# Altium PCB SiLPA.PcbDoc (part 6 of 10)
Units mm, origin at the board's own origin, x right, y up, seen from the top; angles counter-clockwise.
Board outline 222.36 x 100 mm, 4 copper layers (L1, P2, L3, L4), stack 1.598 mm thick; 583 components, 330 nets, 1692 pads, 1781 vias.
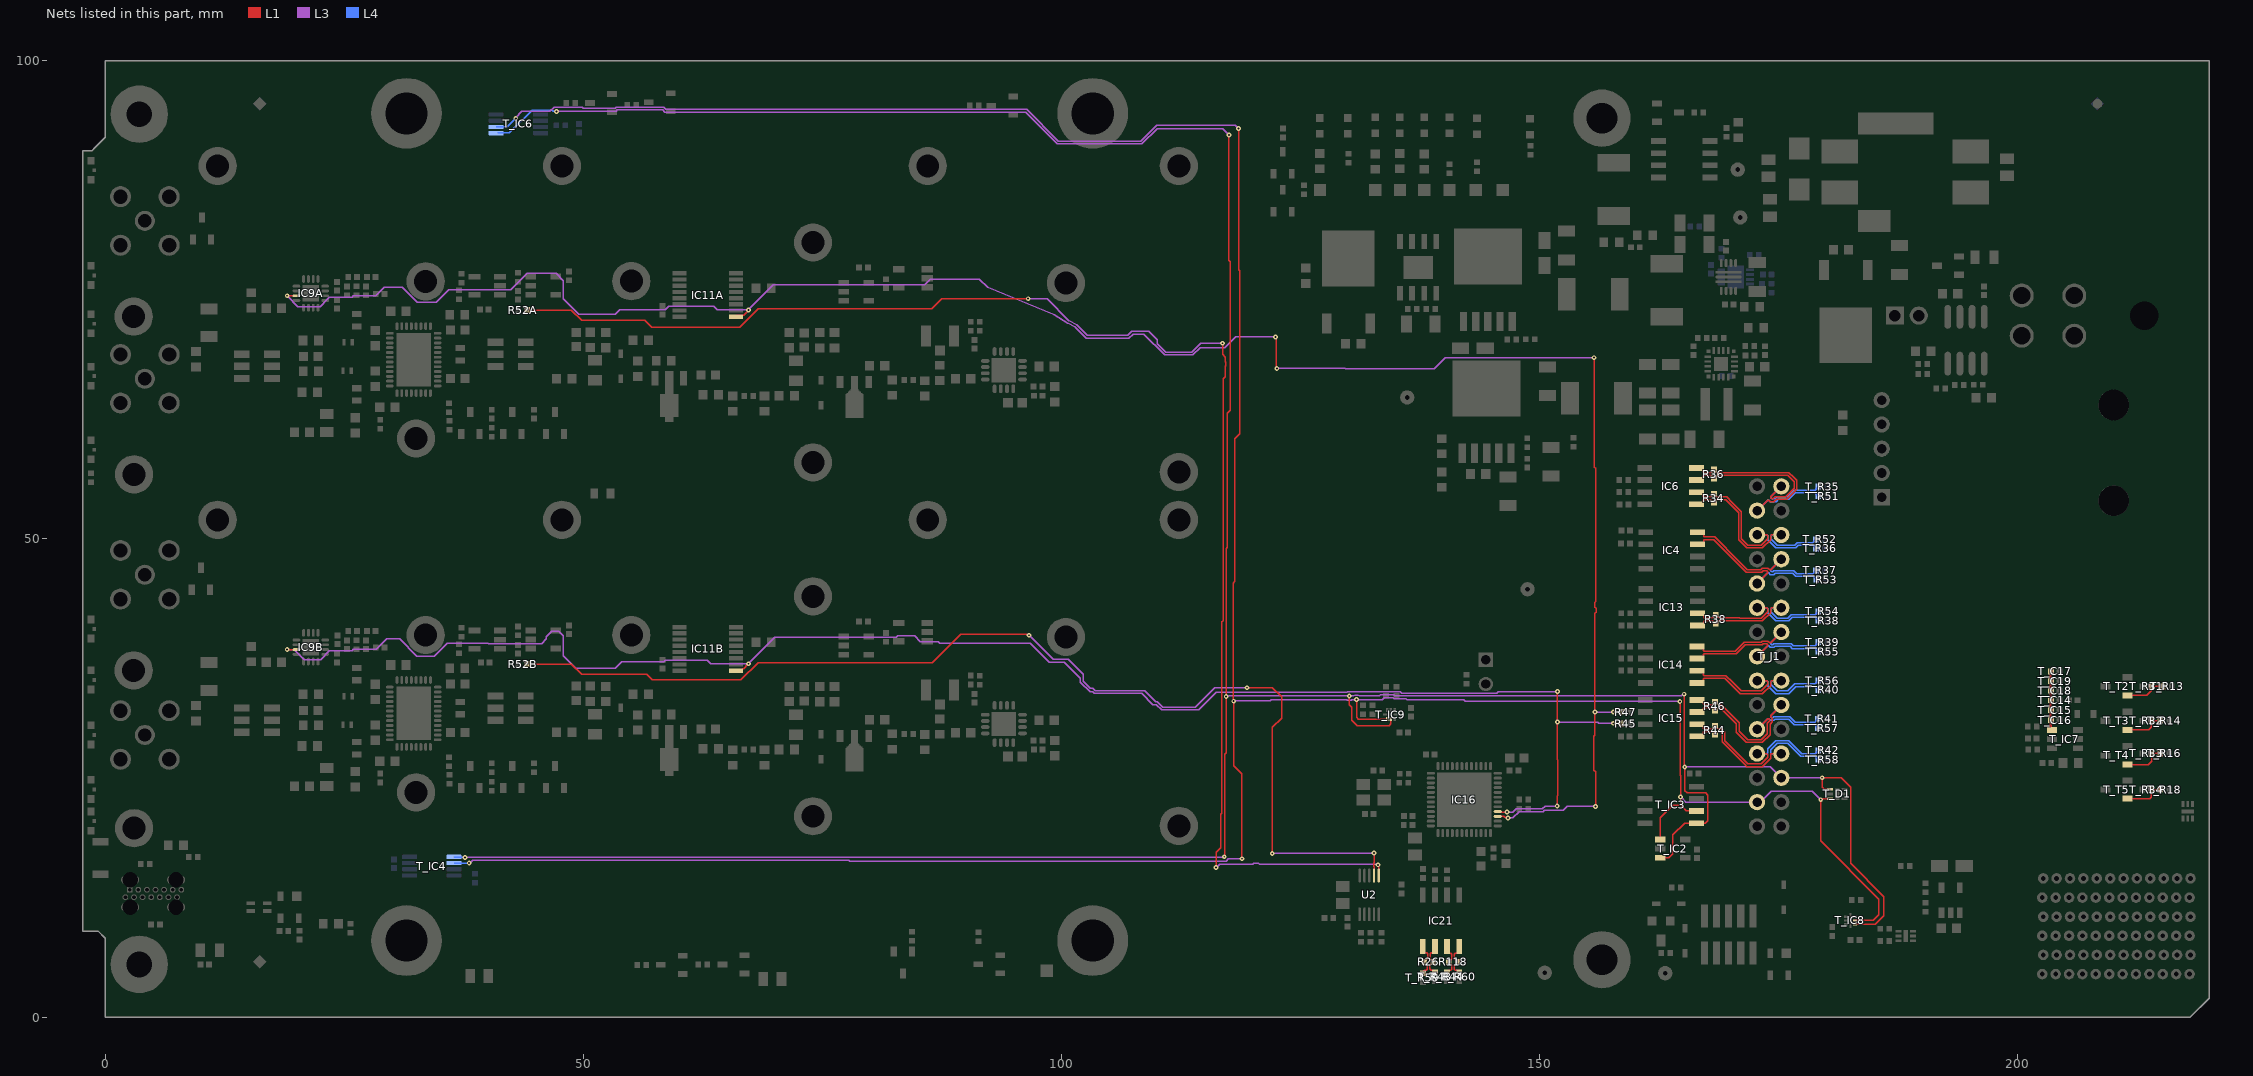
[diagram p6: the nets of this part, all layers, seen from the top]

## Via types
v1: diameter 0.5, hole 0.2, L1 to L4, tented both sides, 1301 vias
v2: diameter 0.6, hole 0.3, L1 to L4, tented both sides, 443 vias
v3: diameter 0.8, hole 0.5, L1 to L4, tented both sides, 25 vias
v4: diameter 0.5, hole 0.2, L1 to L4, 8 vias
v5: diameter 1.27, hole 0.711, L1 to L4, tented both sides, 4 vias

## Nets (pads, with @x,y where several pads share a name; then routed paths per layer and width w, separated by ;. In a path a pad name is that pad's centre, name@x,y a point inside that pad or via, vN(x,y) a via of type N, cw(c..) or ccw(c..) an arc to the next point about the centre after c; other vN are vias at no path point) (continued)
CT: T_C14.2 T_C15.2 T_C16.2 T_C17.2 T_C18.2 T_C19.2 T_IC7.4 | length 6.2
  L1 w0.257: T_C17.2@203.448,36.148 203.448,30.126 T_IC7.4@203.553,30.022
DAC_OUT1: R52A.1 U2.6 | length 151.6
  L1 w0.152: R52A.1@44.1,73.92 48.721,73.92 49.795,72.846 56.428,72.846 57.118,72.156 66.365,72.156 68.269,74.059 86.4,74.059 87.466,75.125 v1(96.5,75.125) ; v1(116.15,15.651) 116.15,17.225 116.636,17.711 116.636,21.21 116.753,21.328 116.753,41.33 116.878,41.454 116.878,49.3 116.878,66.759 117.103,66.983 117.103,68.067 117.15,68.114 117.15,68.49 117.103,68.537 117.103,69.009 116.827,69.285 116.827,70.458 v1(116.821,70.465) ; v1(133.081,15.925) 133.081,15.831 133.163,15.748 U2.6@133.163,14.8
  L3 w0.152: v1(96.5,75.125) 98.479,75.125 100.769,72.836 100.787,72.825 101.57,72.392 102.688,71.274 106.921,71.274 107.347,71.699 109.133,71.699 110.024,70.809 110.024,70.389 110.889,69.524 113.611,69.524 114.553,70.465 v1(116.821,70.465) ; v1(116.15,15.651) 116.195,15.651 116.511,15.967 119.98,15.967 120.106,16.094 120.482,16.094 120.489,16.086 120.574,16.086 120.692,15.967 133.038,15.967 v1(133.081,15.925)
DAC_OUT2: R52B.1 U2.7 | length 116.4
  L1 w0.152: R52B.1@43.979,36.92 48.721,36.92 49.795,35.846 56.607,35.846 57.191,35.262 66.471,35.262 68.269,37.059 86.452,37.059 89.448,40.055 96.375,40.055 96.506,39.924 v1(96.6,39.924) ; v1(119.386,34.441) 122.043,34.441 123,33.484 123,31.265 122.024,30.289 v1(122.024,17.1) ; U2.7@132.663,14.8 132.663,15.701 132.627,15.737 132.627,16.112 132.663,16.148 v1(132.663,17.156)
  L3 w0.152: v1(96.6,39.924) 99.129,37.395 100.682,37.395 102.242,35.834 102.242,35.129 102.967,34.405 103.258,34.405 103.533,34.13 108.68,34.13 109.846,32.964 110.004,32.964 110.573,32.394 113.972,32.394 116.019,34.441 v1(119.386,34.441) ; v1(122.024,17.1) 122.08,17.156 v1(132.663,17.156)
DET_RST0: IC9A.15 IC11A.1 IC16.27 R47.1 | length 215.4
  L1 w0.152: v1(19.02,75.43) IC9A.15@19.99,75.43 ; IC11A.1@65.95,73.225 66.099,73.374 66.746,73.374 67.25,73.878 v1(67.25,73.952) ; v1(122.375,71.125) 122.439,71.061 122.439,67.891 v1(122.504,67.826) ; IC16.27@145.553,20.992 146.248,20.992 146.358,20.882 146.628,20.882 v1(146.679,20.832) ; v1(155.675,68.953) 155.675,57.515 155.825,57.365 155.825,43.451 155.767,43.393 155.767,42.855 155.895,42.727 155.895,42.352 155.767,42.224 155.767,29.48 155.651,29.363 155.651,25.828 155.825,25.654 v1(155.825,22.025) ; v1(157.678,31.9) R47.1@158.529,31.9
  L3 w0.152: v1(19.02,75.43) 20.15,74.3 22.5,74.3 22.85,74.65 ; 22.823,74.677 23.442,75.295 25.801,75.295 25.924,75.418 28.283,75.418 29.158,76.294 31.04,76.294 32.604,74.73 34.613,74.73 35.93,76.047 42.388,76.047 44.099,77.758 47.154,77.758 47.909,77.002 47.909,75.108 49.523,73.494 53.322,73.494 53.802,73.974 58.541,73.974 58.895,74.328 63.634,74.328 64.01,73.952 v1(67.25,73.952) 69.86,76.562 85.67,76.562 86.262,77.153 91.399,77.153 92.257,76.295 99.122,73.474 99.205,73.429 100.653,72.556 100.696,72.556 101.381,72.177 101.4,72.166 101.415,72.151 102.572,70.994 107.037,70.994 107.462,71.42 108.597,71.42 110.773,69.244 113.727,69.244 114.495,70.012 117.054,70.012 118.194,71.151 v1@122.375,71.151 ; v1(122.504,67.826) 129.633,67.826 129.679,67.78 138.964,67.78 140.137,68.953 v1(155.675,68.953) ; v1(146.679,20.832) 147.176,20.832 147.841,21.497 150.363,21.497 150.486,21.619 152.444,21.619 152.85,22.025 v1(155.825,22.025) ; v1@155.768,31.9 v1@157.678,31.9
  other v1: 155.767,31.899
DET_RST1: IC9B.15 IC11B.1 IC16.28 R45.1 | length 172.9
  L1 w0.152: v1(19.02,38.43) IC9B.15@19.99,38.43 ; IC11B.1@65.95,36.225 66.45,36.225 66.672,36.447 66.759,36.447 66.965,36.652 66.965,36.667 v1(67.25,36.952) ; IC16.28@145.553,21.492 145.626,21.418 145.989,21.418 145.991,21.416 146.533,21.416 v1(146.564,21.448) ; v1(151.813,22.073) 151.843,22.102 151.843,23.12 151.857,23.134 151.857,26.889 151.843,26.904 v1(151.843,30.858) 151.843,34.026 v1(151.848,34.031) ; v1(157.678,30.715) 158.511,30.715 R45.1@158.53,30.696
  L3 w0.152: v1(19.02,38.43) 19.743,38.43 20.788,37.385 22.531,37.385 23.442,38.295 25.801,38.295 25.948,38.443 28.307,38.443 29.427,39.563 30.772,39.563 32.587,37.747 34.413,37.747 35.754,39.089 40.02,39.089 40.062,39.047 45.623,39.047 46.132,39.556 46.132,39.788 46.668,40.324 47.409,40.324 47.867,39.865 47.867,37.805 49.177,36.494 53.322,36.494 54,37.172 58.39,37.172 58.546,37.328 62.936,37.328 63.313,36.952 v1(67.25,36.952) 69.996,39.698 82.698,39.698 82.861,39.861 84.639,39.861 85.24,39.26 87.099,39.26 87.249,39.11 96.723,39.11 98.717,37.116 100.275,37.116 101.963,35.428 101.963,35.014 102.982,33.994 103.273,33.994 103.417,33.85 108.374,33.85 109.54,32.684 109.888,32.684 110.457,32.115 114.314,32.115 116.187,33.988 129.844,33.988 129.887,34.031 135.421,34.031 135.579,33.873 145.519,33.873 145.677,34.031 v1(151.848,34.031) ; v1(146.564,21.448) 146.595,21.416 147.178,21.416 147.537,21.776 150.248,21.776 150.544,22.073 v1(151.813,22.073) ; v1(151.843,30.858) 151.891,30.81 156.047,30.81 156.142,30.715 v1(157.678,30.715)
EEM0_I2C.SCL: T_D1.3 T_IC2.1 T_IC3.6 T_IC4.2 T_IC6.2 T_IC8.3 T_IC9.6 T_J1.27 | length 345
  L1 w0.152: v1(117.987,33.034) 117.939,33.081 117.939,45.388 118.113,45.562 118.113,60.487 118.6,60.974 118.6,78.055 118.5,78.155 v1(118.5,92.914) ; v1@118.003,33.034 118.003,26.295 118.855,25.443 v1(118.855,16.558) ; v1(130.835,33.203) 130.835,31.367 131.042,31.16 T_IC9.6@134.029,31.16 ; T_IC2.1@162.604,18.575 162.604,20.853 163.919,22.167 164.715,22.167 ; v1(164.64,32.996) 164.703,32.933 164.703,25.274 164.72,25.257 164.72,23.03 v1(164.715,23.025) 164.715,22.167 ; T_IC3.6@166.4,21.552 165.329,21.552 164.715,22.167 ; T_J1.27@172.625,22.6 T_J1.27@173.025,22.6 ; T_D1.3@180.34,22.828 180.337,22.825 179.562,22.825 179.469,22.732 v1(179.375,22.732) 179.375,18.421 185.466,12.33 185.466,10.695 184.873,10.101 T_IC8.3@182.958,10.101
  L3 w0.152: v1(38.05,16.104) 38.095,16.104 38.411,16.421 77.749,16.421 77.857,16.313 117.195,16.313 117.439,16.558 v1(118.855,16.558) ; v1(42.925,93.983) 42.925,94.059 43.566,94.7 46.489,94.7 46.933,95.144 49.857,95.144 49.983,95.017 53.303,95.017 53.422,95.136 58.403,95.136 58.63,94.909 96.353,94.909 99.66,91.601 108.274,91.601 109.923,93.25 118.164,93.25 v1(118.5,92.914) ; v1(117.987,33.034) 118.033,33.079 121.817,33.079 121.941,33.203 129.809,33.203 129.887,33.125 130.262,33.125 130.341,33.203 v1(130.835,33.203) 133.513,33.203 133.727,33.418 134.616,33.418 134.762,33.272 136.036,33.272 136.104,33.203 142.037,33.203 142.202,33.038 164.598,33.038 v1(164.64,32.996) ; v1(164.715,23.025) 165.261,22.478 T_J1.27@172.714,22.478 173.028,22.478 174.175,23.625 178.482,23.625 v1(179.375,22.732)
  L4 w0.152: T_IC4.2@36.471,16.104 v1(38.05,16.104) ; T_IC6.2@40.86,93.076 42.019,93.076 42.461,93.519 ; 42.462,93.519 v1@42.925,93.982
EEM0_I2C.SDA: T_D1.1 T_IC2.3 T_IC3.5 T_IC4.1 T_IC6.1 T_IC8.2 T_IC9.7 T_J1.26 | length 353.5
  L1 w0.152: v1(117.007,16.767) 117.033,16.792 117.033,27.471 117.207,27.644 117.207,48.987 117.331,49.112 117.331,63.152 117.647,63.468 117.647,78.975 117.5,79.122 v1(117.5,92.25) ; v1(130.075,33.578) 130.075,32.646 130.337,32.385 130.337,31.042 130.905,30.473 134.238,30.473 134.429,30.664 T_IC9.7@134.429,31.16 ; T_IC2.3@162.604,16.675 163.5,16.675 163.904,17.079 163.904,19.044 165.143,20.282 T_IC3.5@166.4,20.282 166.407,20.289 167.314,20.289 167.57,20.545 167.57,23.22 167.345,23.445 165.401,23.445 165.156,23.69 v1(165.156,26.165) 165.125,26.197 165.125,33.733 v1(165.093,33.764) ; T_D1.1@180.34,23.828 180.337,23.832 179.722,23.832 179.525,24.028 v1(179.525,25.025) 181.525,25.025 182.505,24.045 182.505,16.07 185.965,12.61 185.965,10.615 185.051,9.701 T_IC8.2@182.958,9.701
  L3 w0.152: v1(37.614,16.7) 116.847,16.7 116.913,16.767 v1(117.007,16.767) ; v1(47.187,94.691) 47.234,94.738 53.419,94.738 53.538,94.857 58.287,94.857 58.515,94.629 96.237,94.629 99.545,91.322 108.39,91.322 109.983,92.914 116.836,92.914 v1(117.5,92.25) ; v1(117.207,33.535) 117.25,33.578 v1(130.075,33.578) 130.569,33.578 130.647,33.656 131.023,33.656 131.101,33.578 133.225,33.578 133.344,33.697 134.732,33.697 134.851,33.578 164.813,33.578 164.999,33.764 v1(165.093,33.764) ; v1(165.156,26.165) 174.108,26.165 T_J1.26@175.254,25.018 175.258,25.022 179.522,25.022 v1(179.525,25.025)
  L4 w0.152: T_IC4.1@36.471,16.754 36.498,16.727 37.587,16.727 v1(37.614,16.7) ; T_IC6.1@41.06,92.454 42.248,92.454 44.626,94.832 46.735,94.832 46.846,94.721 47.156,94.721 v1(47.187,94.691)
EEM_IO.LVDS_N0: IC6.4 R36.2 T_J1.3 T_R51.2 | length 25.1
  L1 w0.152: IC6.4@166.378,57.425 166.797,57.425 167.021,57.201 167.021,57.019 167.112,56.928 167.89,56.928 167.98,57.017 167.98,57.044 168.193,57.258 R36.2@168.213,57.258 168.233,57.258 168.447,57.044 168.447,57.017 168.537,56.928 176.057,56.928 176.55,56.434 176.875,56.11 176.875,55.199 175.817,54.14 174.723,54.14 174.478,53.895 174.12,53.895 173.949,54.066 173.822,54.066 T_J1.3@172.714,52.958
  L4 w0.152: T_J1.3@172.714,52.958 173.822,54.066 173.949,54.066 174.12,53.895 174.702,53.895 174.947,54.14 176.032,54.14 176.727,54.834 178.827,54.834 178.916,54.745 178.916,54.684 T_R51.2@179.13,54.47
EEM_IO.LVDS_N1: IC6.1 R34.1 T_J1.6 T_R52.2 | length 20.8
  L1 w0.152: IC6.1@166.378,53.615 166.797,53.615 167.021,53.839 167.021,54.021 167.111,54.11 167.65,54.11 167.655,54.115 167.87,54.115 167.96,54.026 167.96,53.999 168.173,53.785 R34.1@168.193,53.785 168.213,53.785 168.427,53.999 168.427,54.026 168.517,54.115 169.424,54.115 170.029,53.51 170.794,52.746 170.794,49.904 170.957,49.741 171.474,49.224 171.638,49.06 173.277,49.06 174.124,49.908 174.124,50.329 174.213,50.418 T_J1.6@175.254,50.418
  L4 w0.152: T_J1.6@175.254,50.418 174.213,50.418 174.124,50.329 174.124,50.023 174.808,49.34 176.661,49.34 176.929,49.608 178.547,49.608 178.636,49.698 178.636,49.736 T_R52.2@178.85,49.95
EEM_IO.LVDS_N2: IC4.7 T_J1.9 T_R53.2 | length 17.9
  L1 w0.152: IC4.7@166.479,49.435 166.898,49.435 167.122,49.659 167.122,49.841 167.211,49.93 168.173,49.93 170.666,47.437 171.598,46.505 173.226,46.505 173.383,46.662 173.733,46.662 173.822,46.573 173.822,46.446 T_J1.9@172.714,45.338
  L4 w0.152: T_J1.9@172.714,45.338 173.822,46.446 173.949,46.446 174.12,46.275 174.478,46.275 174.594,46.392 176.456,46.392 176.76,46.087 178.583,46.087 178.672,45.998 178.672,45.97 T_R53.2@178.886,45.756
EEM_IO.LVDS_N3: IC13.1 R38.1 T_J1.12 T_R54.2 | length 17.3
  L1 w0.152: IC13.1@166.478,40.952 166.897,40.952 167.121,41.176 167.121,41.358 167.211,41.447 167.497,41.447 167.511,41.462 168.072,41.462 168.162,41.372 168.162,41.345 168.375,41.131 R38.1@168.395,41.131 168.415,41.131 168.629,41.345 168.629,41.372 168.718,41.462 170.792,41.462 170.813,41.44 173.277,41.44 174.124,42.288 174.124,42.709 174.213,42.798 T_J1.12@175.254,42.798
  L4 w0.152: T_J1.12@175.254,42.798 174.213,42.798 174.124,42.709 174.124,42.403 174.808,41.72 175.917,41.72 176.277,42.08 178.827,42.08 178.916,42.169 178.916,42.216 T_R54.2@179.13,42.43
EEM_IO.LVDS_N4: IC14.7 T_J1.15 T_R55.2 | length 17.1
  L1 w0.152: IC14.7@166.45,37.484 166.869,37.484 167.093,37.708 167.093,37.89 167.182,37.979 170.556,37.979 171.502,38.926 173.266,38.926 173.383,39.042 173.733,39.042 173.822,38.953 173.822,38.826 T_J1.15@172.714,37.718
  L4 w0.152: T_J1.15@172.714,37.718 173.822,38.826 173.949,38.826 174.12,38.655 174.478,38.655 174.594,38.772 176.176,38.772 176.41,38.538 178.176,38.538 178.199,38.56 178.797,38.56 178.886,38.471 178.886,38.414 T_R55.2@179.1,38.2
EEM_IO.LVDS_N5: IC14.5 T_J1.18 T_R56.2 | length 17.8
  L1 w0.152: IC14.5@166.45,34.944 166.869,34.944 167.093,35.168 167.093,35.35 167.182,35.439 169.341,35.439 170.036,34.744 170.796,33.984 170.96,33.82 173.277,33.82 174.124,34.668 174.124,35.089 174.213,35.178 T_J1.18@175.254,35.178
  L4 w0.152: T_J1.18@175.254,35.178 174.213,35.178 174.124,35.089 174.124,34.783 174.808,34.1 175.917,34.1 176.656,34.839 178.827,34.839 178.916,34.928 178.916,34.965 T_R56.2@179.13,35.178
EEM_IO.LVDS_N6: IC15.4 R46.2 T_J1.21 T_R57.2 | length 21
  L1 w0.152: IC15.4@166.424,33.169 166.843,33.169 167.067,32.946 167.067,32.763 167.156,32.674 167.442,32.674 167.478,32.639 167.99,32.639 168.08,32.728 168.08,32.755 168.293,32.969 R46.2@168.313,32.969 168.333,32.969 168.547,32.755 168.547,32.728 168.636,32.639 168.968,32.639 170.835,30.771 170.835,29.909 171.724,29.02 173.161,29.02 173.793,29.652 173.793,30.746 174.038,30.991 174.038,31.117 173.949,31.206 173.822,31.206 T_J1.21@172.714,30.098
  L4 w0.152: T_J1.21@172.714,30.098 173.822,31.206 173.949,31.206 174.12,31.035 174.478,31.035 174.594,31.152 176.018,31.152 176.594,30.575 178.752,30.575 178.841,30.486 178.841,30.434 T_R57.2@179.055,30.22
EEM_IO.LVDS_N7: IC15.1 R44.1 T_J1.24 T_R58.2 | length 19.8
  L1 w0.152: IC15.1@166.424,29.359 166.843,29.359 167.067,29.583 167.067,29.765 167.156,29.855 167.475,29.855 167.477,29.852 167.99,29.852 168.08,29.763 168.08,29.736 168.293,29.522 R44.1@168.313,29.522 168.333,29.522 168.547,29.736 168.547,29.763 168.636,29.852 168.87,29.852 169.061,29.661 169.061,28.778 169.225,28.615 171.475,26.364 171.639,26.2 173.277,26.2 174.124,27.048 174.124,27.469 174.213,27.558 T_J1.24@175.254,27.558
  L4 w0.152: T_J1.24@175.254,27.558 174.213,27.558 174.124,27.648 174.124,27.953 174.808,28.637 175.917,28.637 177.285,27.268 178.827,27.268 178.916,27.179 178.916,27.136 T_R58.2@179.13,26.922
EEM_IO.LVDS_N8: IC21.1 R26.1 T_R59.2 | length 3.6
  L1 w0.152: IC21.1@137.765,7.375 137.765,6.955 137.989,6.732 138.171,6.732 138.261,6.642 138.261,6.153 137.906,5.799 137.906,5.759 138.12,5.545 138.147,5.545 138.237,5.455 138.237,5 138.147,4.911 137.982,4.911 T_R59.2@137.775,4.704
EEM_IO.LVDS_N9: IC21.4 R118.2 T_R60.2 | length 3.6
  L1 w0.152: T_R60.2@141.575,4.704 141.399,4.881 141.169,4.881 141.08,4.97 141.08,5.248 141.069,5.26 141.069,5.455 141.158,5.545 141.185,5.545 141.399,5.759 141.399,5.799 141.185,6.012 141.159,6.012 141.07,6.102 141.07,6.25 141.075,6.255 141.075,6.586 141.164,6.676 141.352,6.676 141.352,6.732 141.575,6.955 IC21.4@141.575,7.375
EEM_IO.LVDS_P0: IC6.3 R36.1 T_J1.2 T_R35.2 | length 23.7
  L1 w0.152: IC6.3@166.378,56.155 166.797,56.155 167.021,56.379 167.021,56.561 ; 167.029,56.568 167.109,56.648 167.89,56.648 167.98,56.559 167.98,56.532 168.193,56.318 R36.1@168.213,56.318 168.233,56.318 168.447,56.532 168.447,56.559 168.537,56.648 175.941,56.648 176.435,56.155 176.596,55.994 176.596,55.314 175.701,54.42 174.607,54.42 174.362,54.175 174.236,54.175 174.146,54.264 174.146,54.39 T_J1.2@175.254,55.498
  L4 w0.152: T_J1.2@175.254,55.498 174.146,54.39 174.146,54.264 174.236,54.175 174.586,54.175 174.831,54.42 175.917,54.42 176.611,55.114 178.827,55.114 178.916,55.203 178.916,55.265 T_R35.2@179.13,55.478
EEM_IO.LVDS_P1: IC6.2 R34.2 T_J1.5 T_R36.2 | length 20.8
  L1 w0.152: IC6.2@166.378,54.885 166.797,54.885 167.021,54.661 167.021,54.479 167.111,54.39 167.534,54.39 167.539,54.395 167.87,54.395 167.96,54.484 167.96,54.511 168.173,54.725 R34.2@168.193,54.725 168.213,54.725 168.427,54.511 168.427,54.484 168.517,54.395 169.54,54.395 170.144,53.79 171.073,52.861 171.073,50.02 171.753,49.34 173.161,49.34 173.845,50.023 173.845,50.329 173.755,50.418 T_J1.5@172.714,50.418
  L4 w0.152: T_J1.5@172.714,50.418 173.755,50.418 173.845,50.329 173.845,49.908 174.692,49.06 176.776,49.06 177.045,49.329 178.577,49.329 178.666,49.24 178.666,49.214 T_R36.2@178.88,49
EEM_IO.LVDS_P2: IC4.8 T_J1.8 T_R37.2 | length 17.9
  L1 w0.152: IC4.8@166.479,50.705 166.898,50.705 167.122,50.481 167.122,50.299 167.211,50.21 168.289,50.21 170.769,47.73 171.713,46.785 173.11,46.785 173.267,46.941 173.849,46.941 174.02,46.77 174.146,46.77 T_J1.8@175.254,47.878
  L4 w0.152: T_J1.8@175.254,47.878 174.146,46.77 174.146,46.644 174.236,46.555 174.362,46.555 174.478,46.671 176.572,46.671 176.876,46.366 178.577,46.366 178.666,46.456 178.666,46.486 T_R37.2@178.88,46.7
EEM_IO.LVDS_P3: IC13.2 R38.2 T_J1.11 T_R38.2 | length 17.3
  L1 w0.152: IC13.2@166.478,42.222 166.897,42.222 167.121,41.998 167.121,41.816 167.211,41.727 167.381,41.727 167.396,41.741 168.072,41.741 168.162,41.83 168.162,41.858 168.375,42.071 R38.2@168.395,42.071 168.415,42.071 168.629,41.858 168.629,41.83 168.718,41.741 170.907,41.741 170.929,41.72 173.161,41.72 173.845,42.403 173.845,42.709 173.755,42.798 T_J1.11@172.714,42.798
  L4 w0.152: T_J1.11@172.714,42.798 173.755,42.798 173.845,42.709 173.845,42.288 174.692,41.44 176.032,41.44 176.392,41.8 178.827,41.8 178.916,41.711 178.916,41.664 T_R38.2@179.13,41.45
EEM_IO.LVDS_P4: IC14.8 T_J1.14 T_R39.2 | length 17.1
  L1 w0.152: IC14.8@166.45,38.754 166.869,38.754 167.093,38.53 167.093,38.348 167.182,38.259 170.44,38.259 171.387,39.205 173.151,39.205 173.267,39.321 173.849,39.321 174.02,39.15 174.146,39.15 T_J1.14@175.254,40.258
  L4 w0.152: T_J1.14@175.254,40.258 174.146,39.15 174.146,39.024 174.236,38.935 174.362,38.935 174.478,39.051 176.292,39.051 176.526,38.817 178.06,38.817 178.083,38.84 178.797,38.84 178.886,38.929 178.886,38.986 T_R39.2@179.1,39.2
EEM_IO.LVDS_P5: IC14.6 T_J1.17 T_R40.2 | length 17.8
  L1 w0.152: IC14.6@166.45,36.214 166.869,36.214 167.093,35.99 167.093,35.808 167.182,35.719 169.456,35.719 170.152,35.024 171.076,34.1 173.161,34.1 173.845,34.783 173.845,35.089 173.755,35.178 T_J1.17@172.714,35.178
  L4 w0.152: T_J1.17@172.714,35.178 173.755,35.178 173.845,35.089 173.845,34.668 174.692,33.82 176.032,33.82 176.772,34.559 178.827,34.559 178.916,34.47 178.916,34.434 T_R40.2@179.13,34.22
EEM_IO.LVDS_P6: IC15.3 R46.1 T_J1.20 T_R41.2 | length 21.5
  L1 w0.152: IC15.3@166.424,31.899 166.843,31.899 167.067,32.123 167.067,32.305 167.156,32.395 167.327,32.395 167.362,32.359 167.99,32.359 168.08,32.27 168.08,32.243 168.293,32.029 R46.1@168.313,32.029 168.333,32.029 168.547,32.243 168.547,32.27 168.636,32.359 168.852,32.359 170.556,30.655 170.556,29.793 171.609,28.74 173.277,28.74 174.072,29.536 174.072,30.63 174.317,30.875 174.317,31.233 174.146,31.404 174.146,31.53 T_J1.20@175.254,32.638
  L4 w0.152: T_J1.20@175.254,32.638 174.146,31.53 174.146,31.404 174.236,31.315 174.362,31.315 174.478,31.431 176.134,31.431 176.71,30.855 178.777,30.855 178.866,30.944 178.866,30.986 T_R41.2@179.08,31.2
EEM_IO.LVDS_P7: IC15.2 R44.2 T_J1.23 T_R42.2 | length 19.8
  L1 w0.152: IC15.2@166.424,30.629 166.843,30.629 167.067,30.406 167.067,30.223 167.156,30.134 167.591,30.134 167.593,30.132 167.99,30.132 168.08,30.221 168.08,30.248 168.293,30.462 R44.2@168.313,30.462 168.333,30.462 168.547,30.248 168.547,30.221 168.636,30.132 168.986,30.132 169.341,29.777 169.341,28.894 171.755,26.48 173.161,26.48 173.845,27.163 173.845,27.469 173.755,27.558 T_J1.23@172.714,27.558
  L4 w0.152: T_J1.23@172.714,27.558 173.755,27.558 173.845,27.648 173.845,28.069 174.692,28.916 176.032,28.916 177.401,27.548 178.827,27.548 178.916,27.637 178.916,27.681 T_R42.2@179.13,27.894
EEM_IO.LVDS_P8: IC21.2 R26.2 T_R43.2 | length 3.6
  L1 w0.152: IC21.2@139.035,7.375 139.035,6.955 138.812,6.732 138.629,6.732 138.54,6.642 138.54,6.102 138.629,6.012 138.633,6.012 138.846,5.799 138.846,5.759 138.633,5.545 138.605,5.545 138.516,5.455 138.516,5.038 138.643,4.911 138.846,4.911 T_R43.2@139.053,4.704
EEM_IO.LVDS_P9: IC21.3 R118.1 T_R44.2 | length 3.6
  L1 w0.152: T_R44.2@140.305,4.704 140.482,4.881 140.711,4.881 140.801,4.97 140.801,5.132 140.789,5.144 140.789,5.455 140.7,5.545 140.673,5.545 140.459,5.759 R118.1@140.459,5.779 ; IC21.3@140.305,7.375 140.305,6.9 140.529,6.676 140.706,6.676 140.796,6.586 140.796,6.371 140.791,6.366 140.791,6.103 140.7,6.012 140.673,6.012 R118.1@140.459,5.799
GA0: T_R13.1 T_R31.1 T_T2.1 | length 4.3
  L1 w0.152: T_T2.1@211.464,33.638 213.461,33.638 213.959,34.135 T_R31.1@213.959,34.588 T_R13.1@215.119,34.588
GA1: T_R14.1 T_R32.1 T_T3.1 | length 4.2
  L1 w0.152: T_T3.1@211.464,30.035 213.661,30.035 213.959,30.332 T_R32.1@213.959,30.985 T_R14.1@214.869,30.985
GA2: T_R16.1 T_R33.1 T_T4.1 | length 4.4
  L1 w0.152: T_T4.1@211.464,26.412 213.642,26.412 213.967,26.737 213.967,27.572 T_R33.1@213.959,27.58 T_R16.1@214.869,27.58
GA3: T_R18.1 T_R34.1 T_T5.1 | length 4.2
  L1 w0.152: T_T5.1@211.464,22.845 213.792,22.845 213.959,23.012 T_R34.1@213.959,23.785 T_R18.1@214.869,23.785